# Altium PCB SoM-STM32F4.PcbDoc (part 2 of 2)
Units mm, origin at the board's own origin, x right, y up, seen from the top; angles counter-clockwise.
Board outline 45 x 60 mm, 8 copper layers (Top, GND1, Signal 1, Power, GND3, Signal 2, GND4, Bottom), stack 1.6 mm thick; 102 components, 130 nets, 627 pads, 262 vias.
Unrouted connection lines stored in the file: 167.
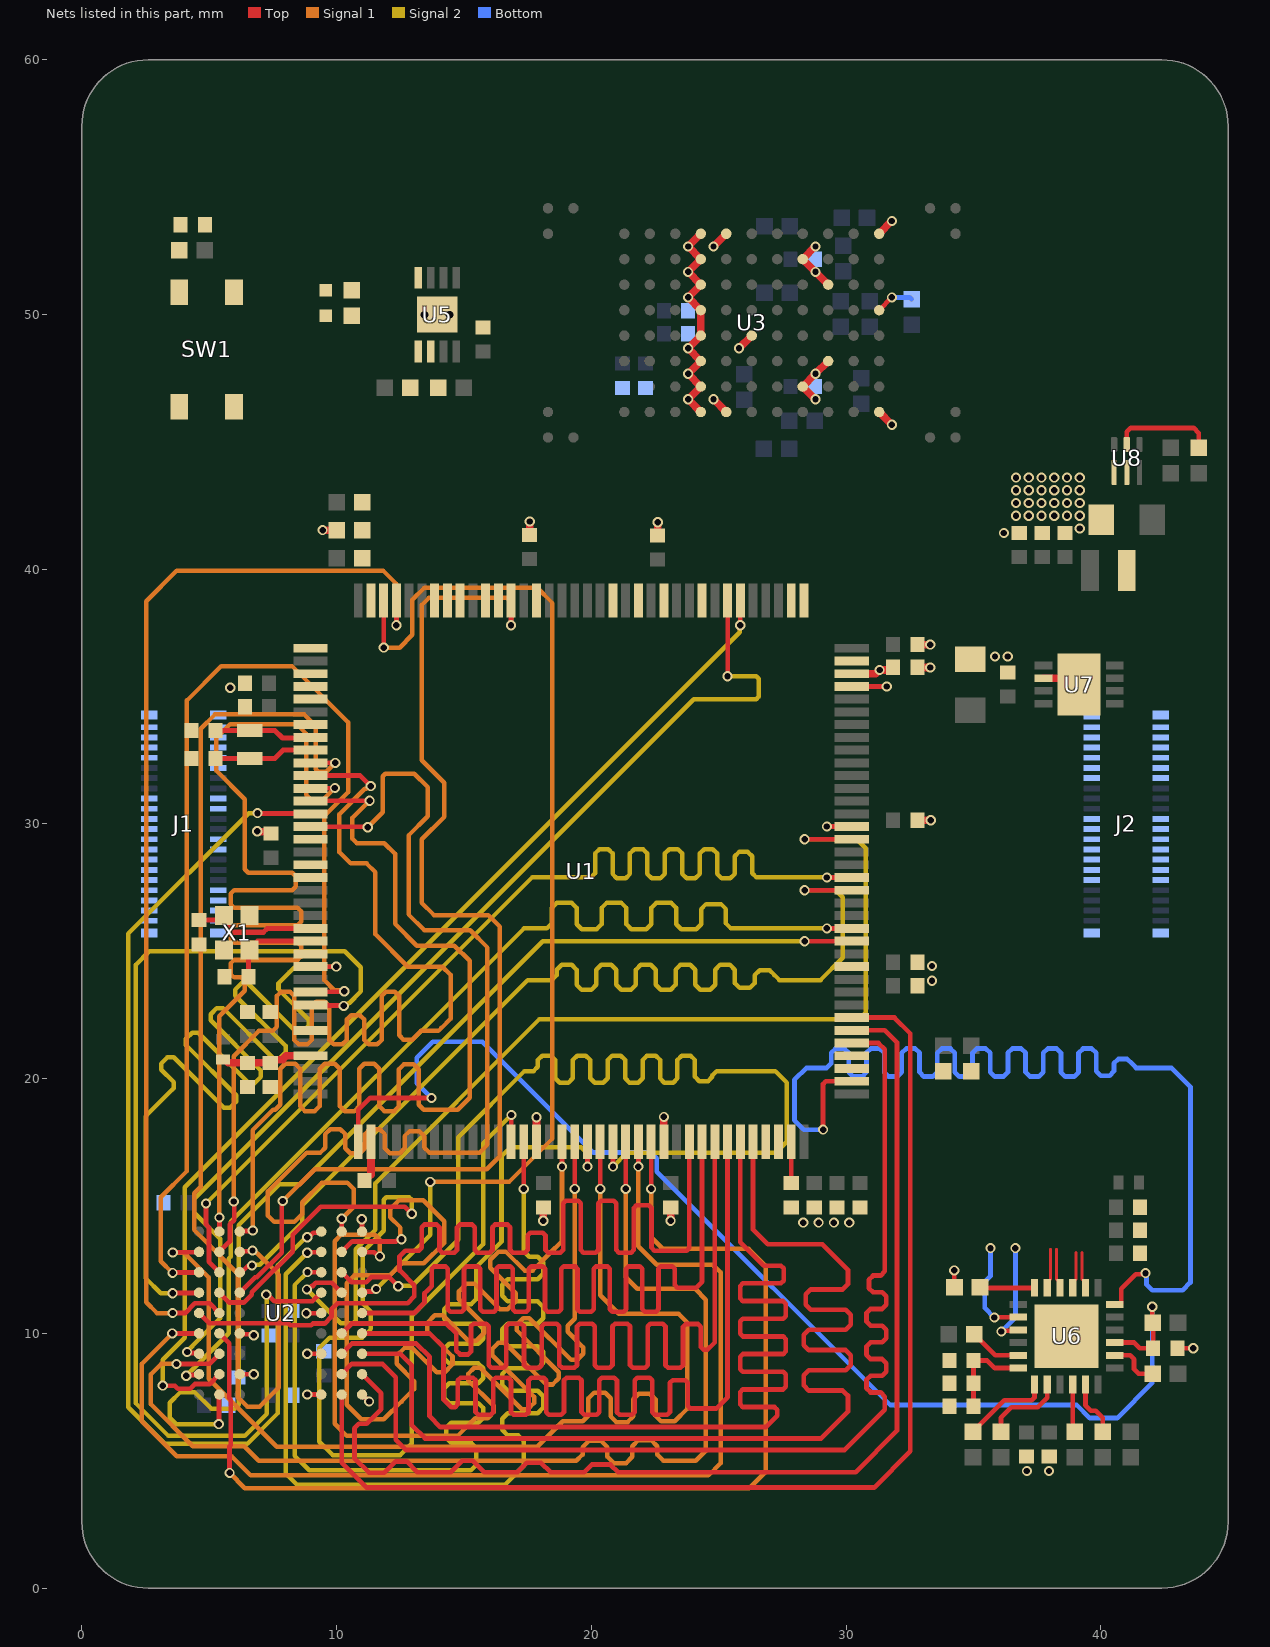
[diagram p8: the nets of this part, all layers, seen from the top]

## Via types
v1: diameter 0.4, hole 0.25, Top to Bottom, tented both sides, 262 vias

## Nets (pads, with @x,y where several pads share a name; then routed paths per layer and width w, separated by ;. In a path a pad name is that pad's centre, name@x,y a point inside that pad or via, vN(x,y) a via of type N, cw(c..) or ccw(c..) an arc to the next point about the centre after c; other vN are vias at no path point) (continued)
ETH_TXD1: U1.74 U6.18 | length 48.6
  Top w0.186: v1(29.1,18) 29.1,19.791 29.209,19.9 U1.74@30.225,19.9 ; U6.18@40.555,11.14 40.76,11.14 40.807,11.187 40.807,11.757 41.377,12.327 41.716,12.327 v1(41.757,12.368)
  Bottom w0.186: v1(29.1,18) 28.35,18 27.975,18.375 27.975,19.95 28.45,20.425 29.15,20.425 29.243,20.425 29.417,20.598 29.417,21.012 29.59,21.186 29.937,21.186 30.111,21.012 30.111,20.257 30.284,20.084 30.631,20.084 30.805,20.257 30.805,21.012 30.978,21.186 31.325,21.186 31.499,21.012 31.499,20.257 31.672,20.084 32.019,20.084 32.193,20.257 32.193,21.012 32.366,21.186 32.713,21.186 32.887,21.012 32.887,20.257 33.06,20.084 33.407,20.084 33.581,20.257 33.581,21.012 33.754,21.186 34.101,21.186 34.275,21.012 34.275,20.257 34.448,20.084 34.795,20.084 34.969,20.257 34.969,21.012 35.142,21.186 35.489,21.186 35.663,21.012 35.663,20.257 35.836,20.084 36.183,20.084 36.357,20.257 36.357,21.012 36.53,21.186 36.877,21.186 37.051,21.012 37.051,20.257 37.224,20.084 37.571,20.084 37.745,20.257 37.745,21.012 37.918,21.186 38.265,21.186 38.439,21.012 38.439,20.257 38.612,20.084 38.959,20.084 39.132,20.257 39.132,21.012 39.306,21.186 39.653,21.186 39.826,21.012 39.826,20.293 40,20.12 40.347,20.12 40.52,20.293 40.52,20.599 40.694,20.772 41.041,20.772 41.214,20.599 41.388,20.425 42.775,20.425 43.05,20.15 43.525,19.675 43.525,12 43.222,11.697 42.024,11.697 41.798,11.923 41.798,12.327 v1(41.757,12.368)
Ethernet_LED1: J2.10 U6.3 | length 4.2
  Top w0.186: v1(36.1,10.075) 36.132,10.107 36.732,10.107 U6.3@36.765,10.14
  Bottom w0.186: v1(36.1,10.075) 36.65,10.625 v1(36.65,13.35)
Ethernet_LED2: J2.9 U6.2 | length 3.9
  Top w0.186: v1(35.825,10.625) 35.832,10.632 36.757,10.632 U6.2@36.765,10.64
  Bottom w0.186: v1(35.675,13.35) 35.675,12.259 35.45,12.034 35.45,11 v1(35.825,10.625)
Ethernet_RX_N: J2.6 U6.22 | length 1.6
  Top w0.108: 38.268,13.3 38.268,12.122 38.4,11.99 U6.22@38.4,11.785
Ethernet_RX_P: J2.4 U6.23 | length 1.6
  Top w0.108: U6.23@37.9,11.785 37.9,11.99 38.032,12.122 38.032,13.3
Ethernet_TX_N: J2.5 U6.20 | length 1.4
  Top w0.108: 39.268,13.175 39.268,12.122 39.4,11.99 U6.20@39.4,11.785
Ethernet_TX_P: J2.3 U6.21 | length 1.4
  Top w0.108: U6.21@38.9,11.785 38.9,11.99 39.032,12.122 39.032,13.175
FMC_A0: U1.10 U2.H7 | length 44
  Top w0.186: U2.H7@6.2,13.212 6.217,13.229 6.668,13.229 v1(6.697,13.258) ; U1.10@8.985,32.41 8.996,32.4 9.929,32.4 v1@9.94,32.41
  Signal 1 w0.177: v1(6.697,13.258) 6.757,13.258 6.869,13.147 6.89,13.147 7.725,12.312 7.725,7.875 6.975,7.125 6.5,7.125 6.125,7.5 6.125,12.349 4.411,14.062 4.411,15.51 4.666,15.765 4.666,33.741 5.225,34.3 8.725,34.3 9.182,33.843 9.182,32.154 9.286,32.05 9.6,32.05 v1(9.95,32.4)
FMC_A1: U1.11 U2.H8 | length 44
  Top w0.186: U2.H8@5.4,13.2 5.813,13.613 5.813,14.283 5.981,14.451 5.981,15.159 v1(5.961,15.179) ; U1.11@8.975,31.9 10.925,31.9 11.337,31.488 v1(11.343,31.488)
  Signal 1 w0.177: v1(5.961,15.179) 5.961,20.886 6.95,21.875 7.4,21.875 7.489,21.875 7.66,22.046 7.66,23.249 7.831,23.421 8.174,23.421 8.345,23.249 8.345,21.52 8.516,21.349 8.859,21.349 9.03,21.52 9.03,22.845 9.201,23.016 9.544,23.016 9.715,22.845 9.715,21.52 9.886,21.349 10.229,21.349 10.4,21.52 10.4,22.327 10.571,22.498 10.914,22.498 11.085,22.327 11.085,21.52 11.256,21.349 11.599,21.349 11.77,21.52 11.77,23.247 11.941,23.418 12.284,23.418 12.455,23.247 12.455,21.704 12.626,21.532 12.969,21.532 13.14,21.704 13.311,21.875 14,21.875 14.118,21.993 14.475,22.35 14.475,24.075 14.15,24.4 12.8,24.4 11.525,25.675 11.525,28.1 11.175,28.45 10.55,28.45 10.1,28.9 10.1,30.375 11.104,31.379 11.173,31.379 11.283,31.488 v1(11.343,31.488)
FMC_A2: U1.12 U2.J8 | length 44
  Top w0.186: U2.J8@5.4,14 v1(5.4,14.55) ; U1.12@8.975,31.4 8.983,31.408 9.927,31.408 v1(9.935,31.415)
  Signal 1 w0.177: v1(5.4,14.55) 5.4,22.45 6.4,23.45 6.4,23.75 6.4,23.839 6.263,23.976 5.975,23.976 5.838,24.113 5.838,24.524 5.975,24.661 8.467,24.661 8.604,24.798 8.604,25.209 8.467,25.346 5.975,25.346 5.838,25.483 5.838,25.894 5.975,26.031 8.467,26.031 8.604,26.168 8.604,26.579 8.467,26.716 5.975,26.716 5.838,26.853 5.838,27.264 5.975,27.401 8.258,27.401 8.395,27.538 8.395,27.949 8.258,28.086 6.537,28.086 6.4,28.223 6.4,28.45 6.4,30.975 5.275,32.1 5.275,33.375 5.825,33.925 8.425,33.925 8.8,33.55 8.8,31.15 9.05,30.9 9.42,30.9 v1(9.935,31.415)
FMC_A3: U1.13 U2.J7 | length 44
  Top w0.186: U2.J7@6.2,14 6.219,14.019 6.69,14.019 v1(6.709,14.038) ; U1.13@8.975,30.9 8.988,30.912 11.293,30.912 v1(11.296,30.915)
  Signal 1 w0.177: v1(6.709,14.038) 6.709,17.984 7.505,18.78 7.594,18.78 7.788,18.975 7.788,20.388 7.982,20.583 8.371,20.583 8.565,20.388 8.565,18.926 8.759,18.732 9.148,18.732 9.342,18.926 9.342,20.388 9.536,20.583 9.925,20.583 10.119,20.388 10.119,18.926 10.313,18.732 10.702,18.732 10.896,18.926 10.896,20.388 11.09,20.583 11.479,20.583 11.673,20.388 11.673,18.926 11.867,18.732 12.256,18.732 12.45,18.926 12.45,20.371 12.644,20.566 13.033,20.566 13.227,20.371 13.227,18.975 13.421,18.78 14.58,18.78 14.755,18.78 15.225,19.25 15.225,24.625 14.625,25.225 13.15,25.225 12.3,26.075 12.3,28.825 11.875,29.25 10.8,29.25 10.625,29.425 10.625,30.25 11.29,30.915 v1(11.296,30.915)
FMC_A4: U1.14 U2.J3 | length 42.7
  Top w0.186: v1(6.895,30.429) 6.91,30.414 8.961,30.414 U1.14@8.975,30.4 ; v1(8.85,13.775) 8.908,13.775 9.09,13.957 9.357,13.957 U2.J3@9.4,14
  Signal 2 w0.177: v1(6.895,30.429) 6.554,30.429 1.825,25.7 1.825,7.1 3.25,5.675 6.5,5.675 7.7,6.875 7.7,12.675 8.8,13.775 v1(8.85,13.775)
FMC_A5: U1.15 U2.J2 | length 44
  Top w0.186: U1.15@8.975,29.9 8.988,29.887 11.212,29.887 v1(11.225,29.875) ; U2.J2@10.188,14.012 10.2,14.025 v1(10.2,14.499)
  Signal 1 w0.177: v1(10.2,14.499) 10.68,14.979 10.68,15.67 10.425,15.925 9.425,15.925 8.65,15.15 8.65,14.691 8.334,14.375 7.55,14.375 7.298,14.627 7.298,14.773 7.3,14.775 7.3,15.575 8.825,17.1 9.278,17.1 9.366,17.1 9.561,17.294 9.561,17.827 9.755,18.021 10.143,18.021 10.338,17.827 10.338,17.266 10.532,17.071 10.92,17.071 11.115,17.266 11.115,17.827 11.309,18.021 11.697,18.021 11.892,17.827 11.892,17.266 12.086,17.071 12.474,17.071 12.669,17.266 12.669,17.748 12.863,17.942 13.251,17.942 13.446,17.748 13.446,17.295 13.64,17.101 15.537,17.101 15.626,17.101 15.925,17.4 15.925,25.15 15.25,25.825 13.45,25.825 12.825,26.45 12.825,29.55 13.575,30.3 13.575,31.45 13.05,31.975 11.91,31.975 11.806,31.871 11.806,30.456 v1(11.225,29.875)
FMC_A6: U1.50 U2.H3 | length 42.7
  Top w0.186: v1(8.85,13.169) 8.865,13.185 9.385,13.185 U2.H3@9.4,13.2 ; v1(17.35,15.675) U1.50@17.35,17.525
  Signal 2 w0.177: v1(8.85,13.169) 8,12.319 8,4.5 8.45,4.05 16.6,4.05 17.35,4.8 17.35,5.247 17.35,5.773 17.131,5.993 16.721,5.993 16.501,6.212 16.501,6.65 16.721,6.87 17.893,6.87 18.113,7.089 18.113,7.527 17.893,7.747 16.721,7.747 16.501,7.966 16.501,8.404 16.721,8.624 17.893,8.624 18.113,8.843 18.113,9.281 17.893,9.501 16.721,9.501 16.501,9.72 16.501,10.158 16.721,10.378 17.893,10.378 18.113,10.597 18.113,11.035 17.893,11.255 16.721,11.255 16.501,11.474 16.501,11.912 16.721,12.132 17.893,12.132 18.113,12.351 18.113,12.789 17.893,13.009 17.569,13.009 17.35,13.228 17.35,13.316 v1(17.35,15.675)
FMC_A7: U1.53 U2.H2 | length 44
  Top w0.186: U2.H2@10.2,13.2 10.613,13.613 12.334,13.613 12.38,13.659 12.509,13.659 v1(12.55,13.7) ; v1(18.85,16.55) U1.53@18.85,17.525
  Signal 1 w0.177: v1@12.575,13.675 v1(12.55,13.7) 12.507,13.743 12.507,14.157 12.098,14.566 12.098,14.873 12.45,15.225 13.4,15.225 14.225,14.4 14.225,13.55 13.425,12.75 12.559,12.75 12.084,12.275 10.7,12.275 10.395,11.97 10.395,7.205 10.97,6.63 11.855,6.63 12.55,7.325 13.041,7.816 13.041,8.126 12.357,8.811 12.357,9.121 12.667,9.431 12.977,9.431 13.931,8.477 14.241,8.477 14.551,8.787 14.551,9.097 13.55,10.098 13.55,10.408 13.86,10.718 14.171,10.718 15.171,9.717 15.481,9.717 15.791,10.027 15.791,10.337 14.791,11.338 14.791,11.648 15.101,11.958 15.411,11.958 16.412,10.957 16.722,10.957 17.032,11.267 17.032,11.578 16.031,12.578 16.031,12.888 16.341,13.198 16.651,13.198 17.382,12.467 17.692,12.467 18.375,13.15 18.85,13.625 v1(18.85,16.55)
FMC_A8: U1.54 U2.H1 | length 44
  Top w0.186: U2.H1@11,13.2 11.017,13.183 11.484,13.183 11.642,13.025 v1(11.7,13.025) ; v1(19.35,15.675) U1.54@19.35,17.525
  Signal 1 w0.177: v1(11.7,13.025) 11.7,13.675 11.5,13.875 10.175,13.875 9.923,13.623 9.923,13.477 9.925,13.475 9.925,6.45 10.4,5.975 14.75,5.975 15.1,6.325 15.445,6.67 15.687,6.67 15.93,6.67 16.172,6.912 16.172,7.155 15.16,8.166 15.16,8.408 15.402,8.651 15.644,8.651 17.269,7.026 17.511,7.026 17.753,7.268 17.753,7.511 16.115,9.149 16.115,9.391 16.357,9.634 16.599,9.634 18.238,7.995 18.48,7.995 18.722,8.237 18.722,8.479 17.083,10.118 17.083,10.36 17.325,10.602 17.568,10.602 19.206,8.964 19.448,8.964 19.691,9.206 19.691,9.448 19.078,10.061 19.078,10.303 19.141,10.366 19.35,10.575 v1(19.35,15.675)
FMC_A9: U1.55 U2.G3 | length 42.7
  Top w0.186: v1(8.856,12.407) 8.859,12.403 9.397,12.403 U2.G3@9.4,12.4 ; v1(19.85,16.55) U1.55@19.85,17.525
  Signal 2 w0.177: v1(8.856,12.407) 8.35,11.9 8.35,5.2 8.925,4.625 15.275,4.625 15.475,4.825 15.475,5.375 15.475,5.518 15.281,5.713 14.498,5.713 14.304,5.907 14.304,6.295 14.498,6.49 15.558,6.49 15.752,6.684 15.752,7.072 15.558,7.267 14.419,7.267 14.224,7.461 14.224,7.849 14.419,8.044 15.558,8.044 15.752,8.238 15.752,8.626 15.558,8.821 14.419,8.821 14.224,9.015 14.224,9.403 14.419,9.598 15.558,9.598 15.752,9.792 15.752,10.18 15.558,10.375 14.419,10.375 14.224,10.569 14.224,10.957 14.419,11.152 15.281,11.152 15.475,11.346 15.475,12.211 15.475,12.6 16.475,13.6 16.475,16.95 16.825,17.3 19.6,17.3 19.85,17.05 v1(19.85,16.55)
FMC_A10: U1.56 U2.H9 | length 44
  Top w0.186: v1(3.571,13.175) 3.583,13.187 U2.H9@4.587,13.187 ; v1(20.35,15.675) U1.56@20.35,17.525
  Signal 1 w0.177: v1(3.571,13.175) 3.583,13.162 4.013,13.162 4.977,12.198 4.977,8.223 7.65,5.55 17.875,5.55 18.875,6.55 19.582,6.55 19.671,6.55 19.89,6.769 19.89,7.452 20.109,7.671 20.548,7.671 20.767,7.452 20.767,6.741 20.986,6.522 21.425,6.522 21.644,6.741 21.644,7.411 21.863,7.63 22.302,7.63 22.521,7.411 22.521,6.769 22.74,6.55 23.15,6.55 23.275,6.55 23.775,7.05 23.775,10.425 23.425,10.775 21.075,10.775 20.35,11.5 v1(20.35,15.675)
FMC_A11: U1.57 U2.G2 | length 42.7
  Top w0.186: U2.G2@10.2,12.4 10.587,12.013 11.16,12.013 11.36,12.213 12.062,12.213 v1(12.425,11.85) ; v1(20.85,16.55) U1.57@20.85,17.525
  Signal 2 w0.177: v1(12.425,11.85) 12.44,11.865 12.965,11.865 14.775,13.675 14.775,17.7 17.375,20.3 17.644,20.3 17.733,20.3 17.904,20.471 17.904,20.735 18.075,20.906 18.418,20.906 18.589,20.735 18.589,20.015 18.76,19.843 19.103,19.843 19.274,20.015 19.274,20.735 19.445,20.906 19.788,20.906 19.959,20.735 19.959,20.015 20.13,19.843 20.473,19.843 20.644,20.015 20.644,20.735 20.815,20.906 21.158,20.906 21.329,20.735 21.329,20.015 21.5,19.843 21.843,19.843 22.014,20.015 22.014,20.735 22.185,20.906 22.528,20.906 22.699,20.735 22.699,20.015 22.87,19.843 23.213,19.843 23.384,20.015 23.384,20.735 23.555,20.906 23.898,20.906 24.069,20.735 24.069,20.077 24.24,19.906 24.583,19.906 24.754,20.077 24.754,20.129 24.925,20.3 26.98,20.3 27.225,20.3 27.675,19.85 27.675,17.525 27.25,17.1 21.4,17.1 v1(20.85,16.55)
FMC_A14: U1.89 U2.G7 | length 42.7
  Top w0.186: U2.G7@6.2,12.4 6.261,12.4 6.488,12.627 6.641,12.627 v1(6.682,12.668) ; v1(28.375,27.4) U1.89@30.225,27.4
  Signal 2 w0.177: v1(6.682,12.668) 6.706,12.693 6.987,12.693 8.65,14.356 8.65,15.025 17.5,23.875 18.363,23.875 18.451,23.875 18.645,24.069 18.645,24.28 18.84,24.475 19.228,24.475 19.422,24.28 19.422,23.689 19.617,23.494 20.005,23.494 20.199,23.689 20.199,24.28 20.394,24.475 20.782,24.475 20.976,24.28 20.976,23.689 21.171,23.494 21.559,23.494 21.753,23.689 21.753,24.28 21.948,24.475 22.336,24.475 22.53,24.28 22.53,23.689 22.725,23.494 23.113,23.494 23.307,23.689 23.307,24.28 23.502,24.475 23.89,24.475 24.084,24.28 24.084,23.689 24.279,23.494 24.667,23.494 24.861,23.689 24.861,24.28 25.056,24.475 25.444,24.475 25.638,24.28 25.638,23.756 25.833,23.562 26.221,23.562 26.415,23.756 26.415,24.069 26.61,24.264 26.998,24.264 27.192,24.069 27.387,23.875 28.475,23.875 29,23.875 29.875,24.75 29.875,27.125 29.6,27.4 v1(28.375,27.4)
FMC_A15: U1.90 U2.G8 | length 42.7
  Top w0.186: v1(4.875,15.1) 4.877,15.098 4.877,14.27 4.987,14.16 4.987,12.813 U2.G8@5.4,12.4 ; v1(29.25,27.9) U1.90@30.225,27.9
  Signal 2 w0.177: v1(4.875,15.1) 17.675,27.9 19.889,27.9 19.977,27.9 20.148,28.071 20.148,28.843 20.32,29.014 20.662,29.014 20.833,28.843 20.833,28.04 21.005,27.869 21.347,27.869 21.518,28.04 21.518,28.843 21.69,29.014 22.032,29.014 22.203,28.843 22.203,28.04 22.375,27.869 22.717,27.869 22.888,28.04 22.888,28.843 23.06,29.014 23.402,29.014 23.573,28.843 23.573,28.04 23.745,27.869 24.087,27.869 24.258,28.04 24.258,28.843 24.43,29.014 24.772,29.014 24.943,28.843 24.943,28.04 25.115,27.869 25.457,27.869 25.628,28.04 25.628,28.731 25.8,28.903 26.142,28.903 26.313,28.731 26.313,28.071 26.485,27.9 27.575,27.9 v1(29.25,27.9)
FMC_D0: U1.85 U2.A8 | length 42.7
  Top w0.186: v1(5.375,6.438) 5.388,6.451 5.388,7.587 U2.A8@5.4,7.6 ; v1(28.375,25.4) U1.85@30.225,25.4
  Signal 2 w0.177: v1(5.375,6.438) 3.712,6.438 3.45,6.7 3.45,7.275 3.875,7.7 4.425,7.7 5.075,7.05 6,7.05 6.156,7.206 6.156,14.256 7.762,15.862 8.55,15.862 18.088,25.4 v1(28.375,25.4)
FMC_D1: U1.86 U2.B9 | length 42.7
  Top w0.186: v1(4.1,8.336) 4.132,8.368 4.568,8.368 U2.B9@4.587,8.387 ; v1(29.25,25.9) U1.86@30.225,25.9
  Signal 2 w0.177: v1(4.1,8.336) 4.104,8.336 5.772,10.004 5.772,12.94 5.85,13.018 5.85,14.392 17.358,25.9 18.165,25.9 18.254,25.9 18.449,26.095 18.449,26.704 18.644,26.9 19.231,26.9 19.426,26.704 19.426,26.059 19.621,25.863 20.208,25.863 20.403,26.059 20.403,26.704 20.598,26.9 21.185,26.9 21.38,26.704 21.38,26.059 21.575,25.863 22.162,25.863 22.357,26.059 22.357,26.704 22.552,26.9 23.139,26.9 23.334,26.704 23.334,26.059 23.529,25.863 24.116,25.863 24.311,26.059 24.311,26.661 24.506,26.856 25.093,26.856 25.288,26.661 25.288,26.095 25.483,25.9 27.725,25.9 v1(29.25,25.9)
FMC_D2: U1.114 U2.B8 | length 42.7
  Top w0.186: v1(3.175,7.95) 3.182,7.943 3.654,7.943 3.772,7.825 4.251,7.825 4.439,8.013 5.013,8.013 U2.B8@5.4,8.4 ; v1(25.85,37.8) U1.114@25.85,38.775
  Signal 2 w0.177: v1(3.175,7.95) 3.175,8.97 4.034,9.829 4.034,15.734 25.823,37.523 25.823,37.773 v1(25.85,37.8)
FMC_D3: U1.115 U2.C9 | length 42.7
  Top w0.186: v1(4.132,9.272) 4.168,9.236 4.539,9.236 U2.C9@4.587,9.188 ; v1(25.35,35.8) 25.362,35.812 25.362,38.762 U1.115@25.35,38.775
  Signal 2 w0.177: v1(4.132,9.272) 4.132,9.3 4.6,9.768 5.426,10.594 5.426,13.721 4.411,14.736 4.411,15.292 24.02,34.9 26.471,34.9 26.575,35.004 26.575,35.696 26.471,35.8 v1(25.35,35.8)
FMC_D4: U1.58 U2.C8 | length 44
  Top w0.186: v1(3.713,8.8) 3.717,8.804 4.396,8.804 4.405,8.813 5.013,8.813 U2.C8@5.388,9.188 ; v1(21.35,15.675) U1.58@21.35,17.525
  Signal 1 w0.177: v1(3.713,8.8) 3.11,8.8 2.712,8.401 2.712,7.213 4.349,5.575 6.375,5.575 6.95,5 18.7,5 19.414,5 19.658,5.244 19.658,5.534 19.902,5.778 20.391,5.778 20.635,5.534 20.635,5.156 20.879,4.912 21.368,4.912 21.612,5.156 21.612,5.569 21.856,5.813 22.345,5.813 22.589,5.569 22.589,5.244 22.833,5 23.899,5 24.1,5 24.5,5.4 24.5,11.325 24.075,11.75 21.8,11.75 21.35,12.2 v1(21.35,15.675)
FMC_D5: U1.59 U2.D9 | length 44
  Top w0.186: v1(3.55,10) 4.575,10 U2.D9@4.587,9.987 ; v1(21.85,16.55) U1.59@21.85,17.525
  Signal 1 w0.177: v1(3.55,10) 2.35,8.8 2.35,6.55 3.725,5.175 5.875,5.175 6.625,4.425 24.6,4.425 25.075,4.9 25.075,12.4 24.775,12.7 22.575,12.7 21.85,13.425 v1(21.85,16.55)
FMC_D6: U1.60 U2.D8 | length 44
  Top w0.186: U2.D8@5.4,10 5.787,9.613 5.787,7.466 5.843,7.41 5.843,5.61 5.8,5.567 v1(5.8,4.525) ; v1(22.35,15.675) U1.60@22.35,17.525
  Signal 1 w0.177: v1(5.8,4.525) 6.4,3.925 26.2,3.925 26.85,4.575 26.85,12.65 26.175,13.325 22.8,13.325 22.35,13.775 v1(22.35,15.675)
FMC_D7: U1.63 U2.E9 | length 44.9
  Top w0.186: U2.E9@4.6,10.8 5,10.4 8.098,10.4 8.172,10.326 9.007,10.326 9.071,10.389 9.536,10.389 9.8,10.653 9.8,10.947 10.04,11.187 12.787,11.187 13.05,11.45 13.05,11.9 12.475,12.475 12.475,13.025 12.7,13.25 13.141,13.25 13.234,13.25 13.343,13.359 13.343,14.171 13.447,14.275 13.932,14.275 14.037,14.171 14.037,13.276 14.141,13.172 14.626,13.172 14.731,13.276 14.731,14.171 14.835,14.275 15.32,14.275 15.425,14.171 15.425,13.276 15.529,13.172 16.014,13.172 16.119,13.276 16.119,14.171 16.223,14.275 16.708,14.275 16.813,14.171 16.813,13.276 16.917,13.172 17.402,13.172 17.507,13.276 17.507,13.853 17.611,13.957 18.096,13.957 18.201,13.853 18.201,13.276 18.305,13.172 18.79,13.172 18.895,13.276 18.895,15.103 18.999,15.207 19.484,15.207 19.589,15.103 19.589,13.276 19.693,13.172 20.178,13.172 20.283,13.276 20.283,15.103 20.387,15.207 20.872,15.207 20.977,15.103 20.977,13.276 21.081,13.172 21.566,13.172 21.671,13.276 21.671,14.923 21.775,15.027 22.26,15.027 22.365,14.923 22.365,13.359 22.473,13.25 23.616,13.25 23.741,13.25 23.85,13.359 U1.63@23.85,17.525
FMC_D8: U1.64 U2.E1 | length 44.4
  Top w0.186: U2.E1@11,10.8 13.05,10.8 13.45,11.2 13.45,11.575 13.532,11.657 13.734,11.859 13.734,12.535 13.829,12.63 14.274,12.63 14.37,12.535 14.37,10.946 14.465,10.851 14.91,10.851 15.006,10.946 15.006,12.535 15.101,12.63 15.546,12.63 15.642,12.535 15.642,10.946 15.737,10.851 16.182,10.851 16.278,10.946 16.278,12.535 16.373,12.63 16.818,12.63 16.914,12.535 16.914,10.946 17.009,10.851 17.454,10.851 17.55,10.946 17.55,12.535 17.645,12.63 18.09,12.63 18.186,12.535 18.186,10.946 18.281,10.851 18.726,10.851 18.822,10.946 18.822,12.535 18.917,12.63 19.362,12.63 19.458,12.535 19.458,10.946 19.553,10.851 19.998,10.851 20.094,10.946 20.094,12.535 20.189,12.63 20.634,12.63 20.73,12.535 20.73,10.946 20.825,10.851 21.27,10.851 21.366,10.946 21.366,12.535 21.461,12.63 21.906,12.63 22.002,12.535 22.002,10.946 22.097,10.851 22.542,10.851 22.638,10.946 22.638,12.535 22.733,12.63 23.178,12.63 23.274,12.535 23.274,11.903 23.382,11.794 24.072,11.794 24.119,11.794 24.35,12.025 U1.64@24.35,17.525
FMC_D9: U1.65 U2.D2 | length 45
  Top w0.186: U2.D2@10.2,10 10.587,10.387 14.313,10.387 14.7,10 14.7,9.325 14.85,9.175 15.075,9.175 15.168,9.175 15.277,9.284 15.277,10.274 15.381,10.378 15.867,10.378 15.971,10.274 15.971,8.752 16.075,8.648 16.561,8.648 16.665,8.752 16.665,10.274 16.769,10.378 17.255,10.378 17.359,10.274 17.359,8.752 17.463,8.648 17.949,8.648 18.053,8.752 18.053,10.274 18.157,10.378 18.643,10.378 18.747,10.274 18.747,8.752 18.851,8.648 19.337,8.648 19.441,8.752 19.441,10.274 19.545,10.378 20.031,10.378 20.135,10.274 20.135,8.752 20.239,8.648 20.725,8.648 20.829,8.752 20.829,10.274 20.933,10.378 21.419,10.378 21.523,10.274 21.523,8.752 21.627,8.648 22.113,8.648 22.217,8.752 22.217,10.274 22.321,10.378 22.807,10.378 22.911,10.274 22.911,8.752 23.015,8.648 23.501,8.648 23.605,8.752 23.605,10.263 23.709,10.367 24.195,10.367 24.299,10.263 24.299,9.471 24.408,9.362 24.562,9.362 24.837,9.637 24.85,9.65 U1.65@24.85,17.525
FMC_D10: U1.66 U2.D1 | length 44.9
  Top w0.186: U2.D1@11,10 13.648,10 14.2,9.448 14.2,7.4 14.406,7.194 14.499,7.101 14.653,7.101 14.762,7.21 14.762,8.159 14.866,8.264 15.352,8.264 15.456,8.159 15.456,6.907 15.56,6.802 16.046,6.802 16.15,6.907 16.15,8.159 16.254,8.264 16.74,8.264 16.844,8.159 16.844,6.907 16.948,6.802 17.434,6.802 17.538,6.907 17.538,8.159 17.642,8.264 18.128,8.264 18.232,8.159 18.232,6.907 18.336,6.802 18.822,6.802 18.926,6.907 18.926,8.159 19.03,8.264 19.516,8.264 19.62,8.159 19.62,6.907 19.724,6.802 20.21,6.802 20.314,6.907 20.314,8.159 20.418,8.264 20.904,8.264 21.008,8.159 21.008,6.907 21.112,6.802 21.598,6.802 21.702,6.907 21.702,8.159 21.806,8.264 22.292,8.264 22.396,8.159 22.396,6.907 22.5,6.802 22.986,6.802 23.09,6.907 23.09,8.055 23.194,8.159 23.68,8.159 23.784,8.055 23.784,7.159 23.893,7.05 24.9,7.05 25.348,7.498 25.35,7.5 U1.66@25.35,17.525
FMC_D11: U1.67 U2.C2 | length 44.9
  Top w0.186: U2.C2@10.2,9.2 10.6,9.6 13.125,9.6 13.65,9.075 13.65,6.75 14.075,6.325 26.85,6.325 27.3,6.775 27.3,6.905 27.3,6.998 27.191,7.107 25.95,7.107 25.846,7.211 25.846,7.697 25.95,7.801 27.532,7.801 27.636,7.905 27.636,8.391 27.532,8.495 25.95,8.495 25.846,8.599 25.846,9.085 25.95,9.189 27.532,9.189 27.636,9.293 27.636,9.779 27.532,9.883 25.95,9.883 25.846,9.987 25.846,10.473 25.95,10.577 27.532,10.577 27.636,10.681 27.636,11.167 27.532,11.271 25.95,11.271 25.846,11.375 25.846,11.861 25.95,11.965 27.447,11.965 27.551,12.069 27.551,12.555 27.447,12.659 26.766,12.659 26.454,12.971 25.85,13.575 U1.67@25.85,17.525
FMC_D12: U1.68 U2.C1 | length 44.9
  Top w0.186: U2.C1@11,9.2 12.5,9.2 12.95,8.75 12.95,6.4 13.475,5.875 29.025,5.875 30.075,6.925 30.075,7.467 30.075,7.56 29.877,7.758 28.545,7.758 28.346,7.957 28.346,8.354 28.545,8.552 29.992,8.552 30.191,8.751 30.191,9.148 29.992,9.346 28.545,9.346 28.346,9.545 28.346,9.942 28.545,10.14 29.992,10.14 30.191,10.339 30.191,10.736 29.992,10.934 28.623,10.934 28.425,11.133 28.425,11.53 28.623,11.728 29.877,11.728 30.075,11.927 30.075,12.5 29.99,12.585 29.075,13.5 26.925,13.5 26.35,14.075 U1.68@26.35,17.525
FMC_D13: U1.77 U2.B2 | length 44.9
  Top w0.186: U2.B2@10.2,8.4 10.6,8.8 11.8,8.8 12.325,8.275 12.325,5.825 12.722,5.428 29.953,5.428 31.525,7 31.525,7.425 31.525,7.518 31.361,7.682 30.965,7.682 30.801,7.846 30.801,8.174 30.965,8.338 31.421,8.338 31.585,8.502 31.585,8.83 31.421,8.994 30.965,8.994 30.801,9.158 30.801,9.486 30.965,9.65 31.421,9.65 31.585,9.814 31.585,10.142 31.421,10.306 30.965,10.306 30.801,10.47 30.801,10.798 30.965,10.962 31.421,10.962 31.585,11.126 31.585,11.454 31.421,11.618 31.063,11.618 30.899,11.782 30.899,12.11 31.063,12.274 31.361,12.274 31.525,12.438 31.525,12.588 31.525,21.15 31.275,21.4 U1.77@30.225,21.4
FMC_D14: U1.78 U2.B1 | length 44.9
  Top w0.186: U2.B1@11,8.4 11.746,7.654 11.746,7.021 11.175,6.45 10.875,6.45 10.7,6.275 10.7,5.1 11.275,4.525 11.875,4.525 12.325,4.975 12.75,4.975 13.175,4.55 14.475,4.55 14.925,5 15.35,5 15.8,4.55 17.1,4.55 17.475,4.925 18.025,4.925 18.4,4.55 19.725,4.55 20.025,4.85 20.75,4.85 21.05,4.55 30.375,4.55 32,6.175 32,21.425 31.525,21.9 U1.78@30.225,21.9
FMC_D15: U1.79 U2.A2 | length 45
  Top w0.186: U2.A2@10.2,7.6 10.2,4.925 11.175,3.95 31.1,3.95 32.525,5.375 32.525,21.775 31.9,22.4 U1.79@30.225,22.4
FMC_NBL0: U1.141 U2.E8 | length 44
  Top w0.186: v1(3.561,10.8) 4.053,10.8 4.44,11.187 5.013,11.187 U2.E8@5.4,10.8 ; v1(12.35,37.8) U1.141@12.35,38.775
  Signal 1 w0.177: v1(3.561,10.8) 2.95,10.8 2.525,11.225 2.525,38.75 3.725,39.95 11.825,39.95 12.35,39.425 v1(12.35,37.8)
FMC_NBL1: U1.142 U2.F1 | length 42.7
  Top w0.186: U2.F1@11,11.6 11.043,11.643 11.394,11.643 11.496,11.745 v1(11.554,11.745) ; v1(11.85,36.925) U1.142@11.85,38.775
  Signal 1 w0.177: v1(11.85,36.925) 12.475,36.925 12.975,37.425 12.975,38.8 13.45,39.275 17.875,39.275 18.475,38.675 18.475,17.65 16.773,15.948 v1(13.675,15.948)
  Signal 2 w0.177: v1(11.554,11.745) 13.675,13.866 v1(13.675,15.948)
FMC_SDCKE0: U1.29 U2.F3 | length 42.8
  Top w0.186: v1(7.237,11.525) 7.294,11.525 7.558,11.262 9.054,11.262 9.392,11.6 U2.F3@9.4,11.6 ; U1.29@8.975,22.9 8.996,22.879 10.257,22.879 v1(10.278,22.857)
  Signal 2 w0.177: v1(7.237,11.525) 7.261,11.5 7.261,6.838 6.399,5.975 3.4,5.975 2.125,7.25 2.125,24.475 2.65,25 10.325,25 10.95,24.375 10.95,23.427 10.492,22.968 10.45,22.968 10.339,22.857 v1(10.278,22.857)
FMC_SDCLK: U1.93 U2.F2 | length 42.7
  Top w0.186: v1(8.835,11.73) 8.893,11.73 9.029,11.866 9.071,11.866 9.192,11.987 9.813,11.987 U2.F2@10.2,11.6 ; v1(28.375,29.4) U1.93@30.225,29.4
  Signal 2 w0.177: v1(8.835,11.73) 10.164,10.4 10.652,10.4 10.756,10.504 10.756,13.307 11.513,14.064 11.513,15.888 17.95,22.325 30.5,22.325 30.775,22.6 30.775,29.05 30.425,29.4 v1(28.375,29.4)
FMC_SDNCAS: U1.132 U2.F7 | length 44
  Top w0.186: U2.F7@6.2,11.6 6.8,12.2 6.875,12.2 7.844,13.169 7.844,14.883 7.845,14.884 7.845,15.157 v1(7.886,15.198) ; v1(16.85,37.8) U1.132@16.85,38.775
  Signal 1 w0.177: v1(7.886,15.198) 9.138,16.45 15.9,16.45 16.4,16.95 16.4,25.975 15.95,26.425 13.825,26.425 13.35,26.9 13.35,29.4 14.225,30.275 14.225,31.625 13.35,32.5 13.35,38.6 13.625,38.875 16.7,38.875 16.85,38.725 v1(16.85,37.8)
FMC_SDNE0: U1.28 U2.G9 | length 44.7
  Top w0.186: v1(3.561,12.375) 3.574,12.387 U2.G9@4.587,12.387 ; U1.28@8.975,23.4 8.991,23.416 10.284,23.416 v1(10.3,23.432)
  Signal 1 w0.177: v1(3.561,12.375) 3.1,12.836 3.1,15.35 4.125,16.375 4.125,34.85 5.475,36.2 8.25,36.2 10.45,34 10.45,31.25 9.525,30.325 9.525,23.862 9.912,23.475 10.257,23.475 v1(10.3,23.432)
FMC_SDNRAS: U1.49 U2.F8 | length 42.7
  Top w0.186: U2.F8@5.4,11.6 5.787,11.213 6.36,11.213 6.668,11.521 6.668,11.618 6.975,11.926 6.989,11.926 8.275,13.211 8.275,13.875 9.376,14.976 12.674,14.976 v1(12.95,14.7) ; U1.49@16.85,17.525 16.857,17.532 16.857,18.568 v1(16.863,18.575)
  Signal 2 w0.177: v1(12.95,14.7) 12.95,15.246 12.846,15.35 11.954,15.35 11.85,15.246 11.85,14.025 11.021,13.196 11.021,11.188 11.35,10.859 11.35,10.175 11,9.825 9.725,9.825 9.325,9.425 9.325,5.75 9.85,5.225 12.5,5.225 12.95,5.675 12.95,10.697 15.75,13.497 15.75,17.461 v1(16.863,18.575)
FMC_SDNWE: U1.26 U2.F9 | length 42.7
  Top w0.186: v1(3.561,11.575) 3.574,11.588 U2.F9@4.587,11.588 ; U1.26@8.975,24.4 v1(9.988,24.4)
  Signal 2 w0.177: v1(3.561,11.575) 3.558,11.579 3.096,11.579 2.5,12.175 2.5,18.525 3.54,19.565 3.603,19.628 3.603,19.87 3.119,20.354 3.119,20.596 3.361,20.838 3.603,20.838 5.579,18.863 5.821,18.863 6.063,19.105 6.063,19.347 4.088,21.322 4.088,21.565 4.33,21.807 4.572,21.807 6.547,19.832 6.79,19.832 7.032,20.074 7.032,20.316 5.056,22.291 5.056,22.533 5.299,22.775 5.541,22.775 7.516,20.8 7.758,20.8 8,21.042 8,21.285 6.025,23.26 6.025,23.502 6.267,23.744 6.51,23.744 8.419,21.835 8.661,21.835 8.903,22.077 8.903,22.319 7.72,23.503 7.72,23.745 8.15,24.175 8.375,24.4 v1(9.988,24.4)
GND: C1.1 C2.1 C3.1 C4.1 C5.1 C6.1 C7.1 C8.1 C9.1 C10.1 C11.1 C12.1 C13.1 C14.1 C16.1 C17.1 C18.1 C19.1 C20.2 C21.2 C22.1 C23.1 C24.1 C25.1 C26.1 C27.1 C28.1 C29.1 C30.1 C31.1 C32.1 C33.1 C34.1 C35.1 C36.1 C37.1 C38.1 C39.1 C40.1 C41.1 C42.1 C43.1 C44.1 C45.1 C46.1 C47.1 C48.1 C49.1 C50.1 C51.1 C52.1 C53.1 C54.2 C55.2 C56.1 D1.1 J1.1 J1.2 J1.7 J1.8 J1.9 J1.15 J1.16 J1.17 J1.23 J1.25 J1.28 J1.33 J1.35 J1.37 J1.38 J1.39 J1.40 J1.S1 J1.S2 J1.S3 J1.S4 J2.1 J2.2 J2.7 J2.8 J2.11 J2.12 J2.19 J2.20 J2.27 J2.28 J2.29 J2.30 J2.31 J2.32 J2.S1 J2.S2 J2.S3 J2.S4 R7.1 R21.2 SW1.3 SW1.4 U1.16 U1.31 U1.38 U1.51 U1.61 U1.83 U1.94 U1.107 U1.120 U1.130 U2.A1 U2.A3 U2.B7 U2.C3 U2.D7 U2.E3 U2.J1 U3.G2 U3.G3 U3.G4 U3.G5 U3.G6 U3.G7 U3.G8 U3.G9 U3.H2 U3.H9 U3.J5 U3.L3 U3.L8 U3.M4 U3.M7 U3.P2 U3.P9 U5.4 U5.9 U6.25 U7.2 U7.9 U8.4 X1.2 X1.4 | length 32.9
  Top w0.186: U2.B7@6.2,8.4 v1(6.75,8.4) ; U2.D7@6.2,10 6.234,9.966 6.716,9.966 v1(6.75,9.932) ; v1(8.813,10.794) 8.817,10.797 9.323,10.797 U2.E3@9.36,10.834 ; v1(8.85,7.6) U2.A3@9.4,7.6 ; v1(8.85,9.2) U2.C3@9.4,9.2 ; v1(10.988,14.482) 10.994,14.476 10.994,14.006 U2.J1@11,14 ; U2.A1@11,7.6 11.003,7.6 11.275,7.328 v1(11.278,7.328) ; v1(29.25,29.9) U1.94@30.225,29.9 ; v1(34.25,12.475) 34.25,11.825 R21.2@34.26,11.815 ; C50.1@43.01,9.415 v1(43.635,9.415)
  Top w0.3: v1(6.886,29.712) 6.906,29.693 7.406,29.693 C23.1@7.419,29.706 ; v1@9.456,41.531 R7.1@9.969,41.531 ; C24.1@11.15,16 11.15,16.025 11.35,16.225 U1.38@11.35,17.525 ; C32.1@17.581,41.356 v1@17.581,41.869 ; U1.51@17.85,17.525 v1(17.85,18.488) ; v1@18.119,14.431 C25.1@18.119,14.944 ; C31.1@22.606,41.331 v1@22.606,41.844 ; U1.61@22.85,17.537 v1(22.85,18.5) ; v1(23.112,14.425) 23.119,14.431 C26.1@23.119,14.944 ; U3.G2@24.3,46.175 v1(23.8,46.675) U3.G3@24.3,47.175 v1(23.8,47.675) U3.G4@24.3,48.175 v1(23.8,48.675) U3.G5@24.3,49.175 U3.G6@24.3,50.175 v1(23.8,50.675) U3.G7@24.3,51.175 v1(23.8,51.675) U3.G8@24.3,52.175 v1(23.8,52.675) U3.G9@24.3,53.175 ; v1(24.8,46.675) U3.H2@25.3,46.175 ; v1(24.8,52.675) U3.H9@25.3,53.175 ; v1(25.8,48.675) U3.J5@26.3,49.175 ; v1(28.8,46.675) U3.L3@28.3,47.175 v1(28.8,47.675) U3.M4@29.3,48.175 ; v1(28.8,52.675) U3.L8@28.3,52.175 v1(28.8,51.675) U3.M7@29.3,51.175 ; U3.P2@31.3,46.175 v1(31.8,45.675) ; U3.P9@31.3,53.175 v1(31.8,53.675) ; C29.1@32.806,30.144 32.812,30.15 v1(33.325,30.15) ; C40.1@32.806,36.144 v1(33.307,36.144) ; C30.1@32.806,37.044 v1(33.307,37.044) ; U7.2@37.75,35.725 38.9,35.725 U7.9@39.15,35.475
  other v1: 37.1,4.6 37.97,4.6 28.325,14.35 28.925,14.35 29.525,14.35 30.125,14.35 18.112,14.425 33.375,23.843 33.375,24.425 5.825,35.35 35.85,36.575 36.35,36.575 36.2,41.425 9.45,41.538 39.175,41.6 22.612,41.85 17.587,41.875 36.675,42.1 37.175,42.1 37.675,42.1 38.175,42.1 38.675,42.1 39.175,42.1 36.675,42.6 37.175,42.6 37.675,42.6 38.175,42.6 38.675,42.6 39.175,42.6 36.675,43.1 37.175,43.1 37.675,43.1 38.175,43.1 38.675,43.1 39.175,43.1 36.675,43.6 37.175,43.6 37.675,43.6 38.175,43.6 38.675,43.6 39.175,43.6
I2C1_SCL: R39.1 U1.136 U5.6
I2C1_SDA: R38.1 U1.137 U5.5
I2C2_SCL: J1.4 R40.1 U1.69
I2C2_SDA: J1.6 R41.1 U1.70
NetC43_2: C43.2 C44.2 C45.2 U6.6 | length 3.7
  Top w0.186: C45.2@35.01,7.14 C44.2@35.01,8.04 C43.2@35.01,8.94 35.535,8.94 35.835,8.64 U6.6@36.765,8.64
NetD1_2: D1.2 R4.2
NetR16_1: R16.1 U6.10 | length 1.9
  Top w0.186: U6.10@38.9,7.995 38.9,6.225 R16.1@38.985,6.14
NetR21_1: R21.1 U6.24 | length 2.2
  Top w0.186: R21.1@35.26,11.815 35.29,11.785 U6.24@37.4,11.785
NetR37_2: R37.2 U3.P6 | length 1.5
  Top w0.186: U3.P6@31.3,50.175 v1(31.8,50.675)
  Bottom w0.186: v1(31.8,50.675) 32.5,50.675 R37.2@32.575,50.6
nINT: R20.2 U6.14 | length 2
  Top w0.186: U6.14@40.555,9.14 41.16,9.14 41.31,8.99 41.31,8.59 41.485,8.415 R20.2@42.035,8.415
OSC32_IN: C21.1 U1.8 X2.2 | length 3.9
  Top w0.2: C21.1@5.25,33.675 X2.2@6.6,33.675 7.575,33.675 7.875,33.375 8.95,33.375 U1.8@8.975,33.4
OSC32_OUT: C55.1 U1.9 X2.1 | length 3.9
  Top w0.2: C55.1@5.25,32.575 X2.1@6.6,32.575 7.575,32.575 7.9,32.9 U1.9@8.975,32.9
OSC_IN: C20.1 U1.23 X1.3 | length 5.2
  Top w0.2: C20.1@4.6,26.225 X1.3@5.4,26.225 ; U1.23@8.975,25.9 7.275,25.9 7.125,25.75 5.909,25.75 5.791,25.867 5.791,26.125 5.691,26.225 X1.3@5.575,26.225 ; X1.3@5.4,26.225 X1.3@5.575,26.225 ; X1.3@5.4,26.225 X1.3@5.575,26.4 X1.3@5.575,26.225
OSC_OUT: C54.1 U1.24 X1.1 | length 3.6
  Top w0.2: C54.1@6.55,24 6.55,25.05 6.9,25.4 U1.24@8.975,25.4
PC13: R4.1 U1.7
PDR_ON: R3.2 U1.143
PE2: J1.30 U1.1
PE4: J1.32 U1.3
PE5: J1.34 U1.4
PE6: J1.36 U1.5
PG: R2.1 U8.2 | length 4
  Top w0.186: U8.2@41.025,44.9 41.025,45.4 41.175,45.55 43.65,45.55 43.85,45.35 R2.1@43.85,44.775
RMII_CLKIN1: R22.2 U6.5 | length 2.1
  Top w0.186: R22.2@35.035,9.965 35.86,9.14 U6.5@36.765,9.14
RMII_MODE2_1: R19.2 U6.11 | length 2.3
  Top w0.186: U6.11@39.4,7.995 39.4,7.175 39.61,6.965 39.81,6.965 40.085,6.69 R19.2@40.085,6.14
RMII_RSTn: C50.2 R23.2 U1.37 U6.15 | length 48.5
  Top w0.186: U1.37@10.85,17.525 10.85,18.775 11.319,19.244 v1(13.726,19.244) ; U6.15@40.555,9.64 41.31,9.64 41.535,9.415 C50.2@42.06,9.415 42.06,10.39 R23.2@42.035,10.415 42.025,10.425 v1(42.025,11.05)
  Bottom w0.186: v1(13.726,19.244) 13.143,19.827 13.143,20.818 13.775,21.45 15.725,21.45 20.075,17.1 22.35,17.1 22.575,16.875 22.575,16.35 31.735,7.19 39.06,7.19 39.575,6.675 40.645,6.675 42.025,8.055 v1(42.025,11.05)
RMII_RXD0_1: R17.2 U6.8 | length 3.2
  Top w0.186: R17.2@36.085,6.14 36.085,6.69 36.495,7.1 37.526,7.1 37.9,7.474 U6.8@37.9,7.995
RMII_RXD1_1: R18.2 U6.7 | length 3.5
  Top w0.186: R18.2@34.985,6.14 36.22,7.375 37.291,7.375 37.4,7.484 U6.7@37.4,7.995
SPI2_CE0: J1.26 U1.122
SPI2_CE1: J1.24 U1.124
SPI2_MISO: J1.22 U1.75
SPI2_MOSI: J1.18 U1.76
SPI2_SCK: J1.20 U1.117
STM_BOOT0: R6.2 R7.2 U1.138
STM_NRST: C56.2 J2.25 R5.2 SW1.1 SW1.2 U1.25
SW: L1.1 U8.5
SYS_JTCK_SWCLK: J2.21 U1.109
SYS_JTDI: J2.22 U1.110
SYS_JTDO_SWO: J2.24 U1.133
SYS_JTMS_SWDIO: J2.23 U1.105 | length 1.4
  Top w0.186: U1.105@30.225,35.4 v1(31.6,35.4)
SYS_JTRST: J2.26 U1.134
UART7_RX: J1.3 U1.18
UART7_TX: J1.5 U1.19
VCAP_1: C39.2 U1.71 | length 1.6
  Top w0.186: C39.2@27.85,15.9 U1.71@27.85,17.525
VCAP_2: C40.2 U1.106 | length 1.7
  Top w0.3: U1.106@30.225,35.9 31.175,35.9 v1(31.319,36.044) 31.769,36.044 C40.2@31.85,36.125
VDDA: C37.2 C38.2 L2.2 U1.33 | length 3.6
  Top w0.3: L2.2@5.55,20.75 5.625,20.75 5.75,20.625 C37.2@6.5,20.625 7.3,20.625 7.425,20.75 7.875,20.75 8.025,20.9 U1.33@8.975,20.9
pads on no net: U1.2 U1.48 U1.80 U1.81 U1.82 U1.87 U1.88 U1.91 U1.92 U1.118 U1.119 U1.123 U1.125 U1.127 U1.128 U1.129 U1.135 U2.E2 U2.G1 U3.A1 U3.A2 U3.A9 U3.A10 U3.B1 U3.B10 U3.D2 U3.D3 U3.D4 U3.D5 U3.D6 U3.D7 U3.D8 U3.D9 U3.E2 U3.E3 U3.E5 U3.E6 U3.E7 U3.E8 U3.E9 U3.H4 U3.H5 U3.H6 U3.H7 U3.J2 U3.J3 U3.J4 U3.J6 U3.J7 U3.J8 U3.J9 U3.K4 U3.K6 U3.K7 U3.L5 U3.L6 U3.M2 U3.M3 U3.M6 U3.M8 U3.M9 U3.N4 U3.N5 U3.N6 U3.N7 U3.P4 U3.P7 U3.T1 U3.T10 U3.U1 U3.U2 U3.U9 U3.U10 U5.1 U5.2 U5.3 U5.7 U6.4

## Polygon pours and split planes (outlines as drawn)
GND on Top "NONET_L-01_P-001" (solid, pour order 28): 37,35.875 36.825,36.05 36.825,36.775 36.625,36.975 34.275,36.975 34.275,35.975 34.675,35.575 37.75,35.575 37.75,35.875
+3V3 on Top "NONET_L-01_P-001" (solid, pour order 27): 37,35.075 36.825,34.9 36.825,34.175 36.625,33.975 34.275,33.975 34.275,34.975 34.675,35.375 37.75,35.375 37.75,35.075
+3V3ETH on Top "NONET_L-01_P-001" (solid, pour order 19): 40.525,11.775 40.875,12.125 40.875,16.2 40.075,16.2 39.775,15.9 39.775,11.775
GND on Top "NONET_L-01_P-001" (solid, remove dead copper, pour order 17): 38.275,5.165 36.8,5.165 36.8,4.575 37.01,4.365 38.035,4.365 38.275,4.605
+3V3 on Top "NONET_L-01_P-001" (solid, pour order 16): 38.4,7.995 38.405,8 38.525,8 38.525,6.73 38.525,6.075 38.275,5.825 36.775,5.825 36.775,6.625 37,6.85 37.775,6.85 38.275,7.35 38.275,7.999
GND on Top "NONET_L-01_P-001" (solid, pour order 13): 35.9,38.525 44.15,38.525 44.825,39.2 44.825,45.85 44.15,46.525 35.9,46.525 35.65,46.275 35.65,38.775
+3V3 on Top "NONET_L-01_P-001" (solid, pour order 1): 39.925,40.75 36.5,40.75 36.5,39.275 36.721,39.054 39.925,39.054
SW on Top "NONET_L-01_P-001" (solid, pour order 2): 40.675,39.95 40.675,41 40.725,41.05 40.725,43.5 41.025,43.8 41.325,43.5 41.325,41.05 41.375,41 41.375,39.95
5V_POWER on Top "NONET_L-01_P-001" (solid, pour order 3): 41.525,41.35 43.975,41.35 44.175,41.55 44.175,44.1 41.425,44.1 41.425,43.3 41.525,43.2
+3V3 on Top "NONET_L-01_P-001" (solid, remove dead copper, pour order 12): 7.7,21.4 5.875,21.4 5.825,21.35 5.275,21.35 5.275,22.075 5.4,22.2 6,22.2 6.25,21.95 7.7,21.95
GND on Top "NONET_L-01_P-001" (solid, remove dead copper, pour order 11): 4.3,32.275 4.3,33.975 3.75,33.975 3.375,33.6 3.375,32.65 3.75,32.275
GND on Top "NONET_L-01_P-001" (solid, remove dead copper, pour order 9): 6.4,34.3 6.4,35.825 5.85,35.825 5.6,35.575 5.6,34.55 5.85,34.3
+3V3 on Top "NONET_L-01_P-001" (solid, remove dead copper, pour order 8): 7.35,34.3 7.425,34.225 8.8,34.225 8.975,34.4 8.8,34.575 8.2,34.575 8.15,34.625 8.15,35.675 8,35.825 7.35,35.825
GND on Top "NONET_L-01_P-001" (solid, remove dead copper, pour order 7): 32.8,24.875 32.8,23.35 33.35,23.35 33.6,23.6 33.6,24.625 33.35,24.875
+3V3 on Top "NONET_L-01_P-001" (solid, pour order 6): 30.225,24.9 30.4,25.075 32,25.075 32.125,24.95 32.125,23.35 31.2,23.35 31.2,24.575 31.05,24.725 30.4,24.725
GND on Top "NONET_L-01_P-001" (solid, pour order 5): 27.55,14.95 30.85,14.95 30.85,14.3 30.625,14.075 27.775,14.075 27.55,14.3
+3V3 on Top "NONET_L-01_P-001" (solid, pour order 4): 28.35,17.525 30.5,17.525 30.85,17.175 30.85,15.9 28.45,15.9 28.45,16.375 28.175,16.65 28.175,17.525
+3V3 on Bottom "NONET_L-01_P-001" (solid, pour order 26): 30.275,47.175 31.75,47.175 32.075,47.5 32.075,47.9 30.35,47.9 30.275,47.825
+3V3 on Bottom "NONET_L-01_P-001" (solid, pour order 25): 28.1,47.775 29,48.675 29.012,49.887 29.325,50.2 31.25,50.2 31.275,50.225 31.275,50.85 28.45,50.85 28.1,51.2 28.1,52.95 28.325,53.175 29.4,53.175 29.575,53 29.575,52.375 30.225,52.375 30.225,54.05 30.15,54.125 27.8,54.125 27.475,53.8 27.475,49.625 25.825,47.975 24.55,47.975 24.55,47.325 27.15,47.325 27.45,47.025 27.45,44.425 27.475,44.4 28.1,44.4
+3V3 on Bottom "NONET_L-01_P-001" (solid, pour order 24): 20.9,47.8 22.375,47.8 22.575,47.6 22.575,46.45 22.95,46.45 23.125,46.625 23.125,52.725 22.7,53.15 21.325,53.15 20.9,52.725
GND on GND3 (split plane): 42.606,59.49 43.009,59.409 43.39,59.252 43.732,59.023 44.023,58.732 44.252,58.39 44.409,58.009 44.49,57.606 44.49,57.4 44.49,2.6 44.49,2.394 44.409,1.991 44.252,1.61 44.023,1.268 43.732,0.977 43.39,0.748 43.009,0.591 42.606,0.51 42.4,0.51 2.6,0.51 2.394,0.51 1.99,0.591 1.61,0.748 1.268,0.977 0.977,1.268 0.748,1.61 0.591,1.991 0.51,2.394 0.51,2.6 0.51,57.4 0.51,57.606 0.591,58.009 0.748,58.39 0.977,58.732 1.268,59.023 1.61,59.252 1.99,59.409 2.394,59.49 2.6,59.49 42.4,59.49
5V_POWER on Power (split plane): 44.49,25.377 36.692,25.377 35.952,26.117 35.952,35.558 39.647,39.253 39.669,39.286 39.677,39.325 39.677,43.108 40.642,44.073 44.49,44.073
+3V3 on Power (split plane): 42.606,59.49 43.009,59.409 43.39,59.252 43.732,59.023 44.023,58.732 44.252,58.39 44.409,58.009 44.49,57.606 44.49,57.4 44.49,44.277 40.6,44.277 40.561,44.269 40.528,44.247 39.503,43.222 39.481,43.189 39.473,43.15 39.473,39.367 35.778,35.672 35.756,35.639 35.748,35.6 35.748,26.075 35.756,26.036 35.778,26.003 36.578,25.203 36.611,25.181 36.65,25.173 44.49,25.173 44.49,2.6 44.49,2.394 44.409,1.991 44.252,1.61 44.023,1.268 43.732,0.977 43.39,0.748 43.009,0.591 42.606,0.51 42.4,0.51 2.6,0.51 2.394,0.51 1.99,0.591 1.61,0.748 1.268,0.977 0.977,1.268 0.748,1.61 0.591,1.991 0.51,2.394 0.51,2.6 0.51,57.4 0.51,57.606 0.591,58.009 0.748,58.39 0.977,58.732 1.268,59.023 1.61,59.252 1.99,59.409 2.394,59.49 2.6,59.49 42.4,59.49
GND on GND1 (split plane): 42.606,59.49 43.009,59.409 43.39,59.252 43.732,59.023 44.023,58.732 44.252,58.39 44.409,58.009 44.49,57.606 44.49,57.4 44.49,2.6 44.49,2.394 44.409,1.991 44.252,1.61 44.023,1.268 43.732,0.977 43.39,0.748 43.009,0.591 42.606,0.51 42.4,0.51 2.6,0.51 2.394,0.51 1.99,0.591 1.61,0.748 1.268,0.977 0.977,1.268 0.748,1.61 0.591,1.991 0.51,2.394 0.51,2.6 0.51,57.4 0.51,57.606 0.591,58.009 0.748,58.39 0.977,58.732 1.268,59.023 1.61,59.252 1.99,59.409 2.394,59.49 2.6,59.49 42.4,59.49
GND on GND4 (split plane): 42.606,59.49 43.009,59.409 43.39,59.252 43.732,59.023 44.023,58.732 44.252,58.39 44.409,58.009 44.49,57.606 44.49,57.4 44.49,2.6 44.49,2.394 44.409,1.991 44.252,1.61 44.023,1.268 43.732,0.977 43.39,0.748 43.009,0.591 42.606,0.51 42.4,0.51 2.6,0.51 2.394,0.51 1.99,0.591 1.61,0.748 1.268,0.977 0.977,1.268 0.748,1.61 0.591,1.991 0.51,2.394 0.51,2.6 0.51,57.4 0.51,57.606 0.591,58.009 0.748,58.39 0.977,58.732 1.268,59.023 1.61,59.252 1.99,59.409 2.394,59.49 2.6,59.49 42.4,59.49

## Other copper
Power (plane layer: these items are gaps in the copper):
  lines w0.2: 44.625,44.15 44.625,25.275 36.65,25.275 35.85,26.075 35.85,35.6 39.575,39.325 39.575,43.15 40.6,44.175 44.675,44.175

## Silkscreen, mask and mechanical layers (free items; w line width, h text height)
Top Overlay:
  circle w0.7: c42.5,2.5 r2
  circle w0.7: c2.5,2.5 r2
  circle w0.7: c2.5,57.5 r2
  circle w0.7: c42.5,57.5 r2
Board:
  circle w0.05: c42.5,2.5 r1
  circle w0.05: c42.5,57.5 r1
  circle w0.05: c2.5,57.5 r1
  circle w0.05: c2.5,2.5 r1
  lines w0.05: 0,2.6 ccw(c2.6,2.6) 2.6,0 42.4,0 ccw(c42.4,2.6) 45,2.6 45,57.4 ccw(c42.4,57.4) 42.4,60 2.6,60 ccw(c2.6,57.4) 0,57.4 0,2.6